# Altium PCB pcb.PcbDoc
Units mil, origin at the board's own origin, x right, y up, seen from the top; angles counter-clockwise.
Board outline 2565 x 2010 mil, 2 copper layers (Top Layer, Bottom Layer); 7 components, 13 nets, 52 pads, 0 vias.
Unrouted connection lines stored in the file: 10.
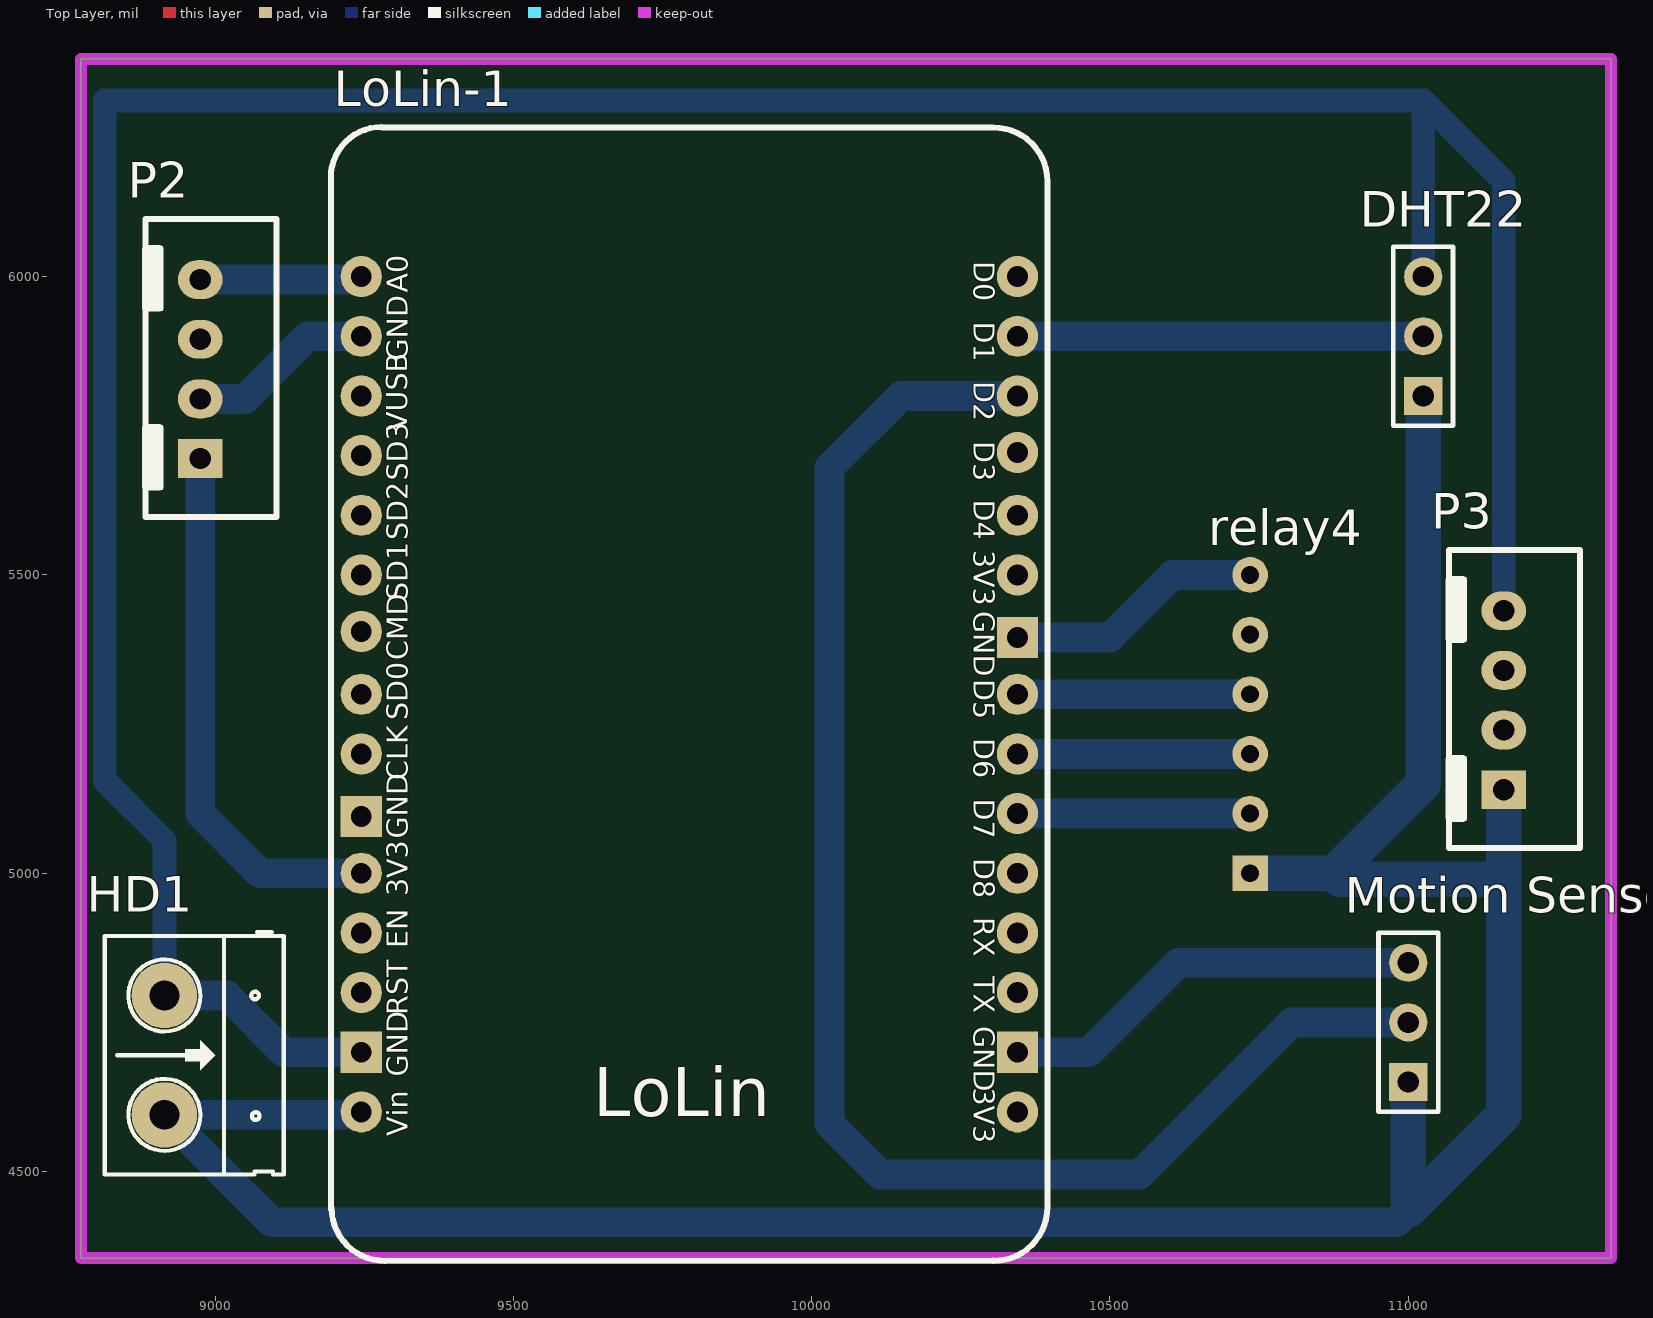
[diagram p0: Top Layer view]
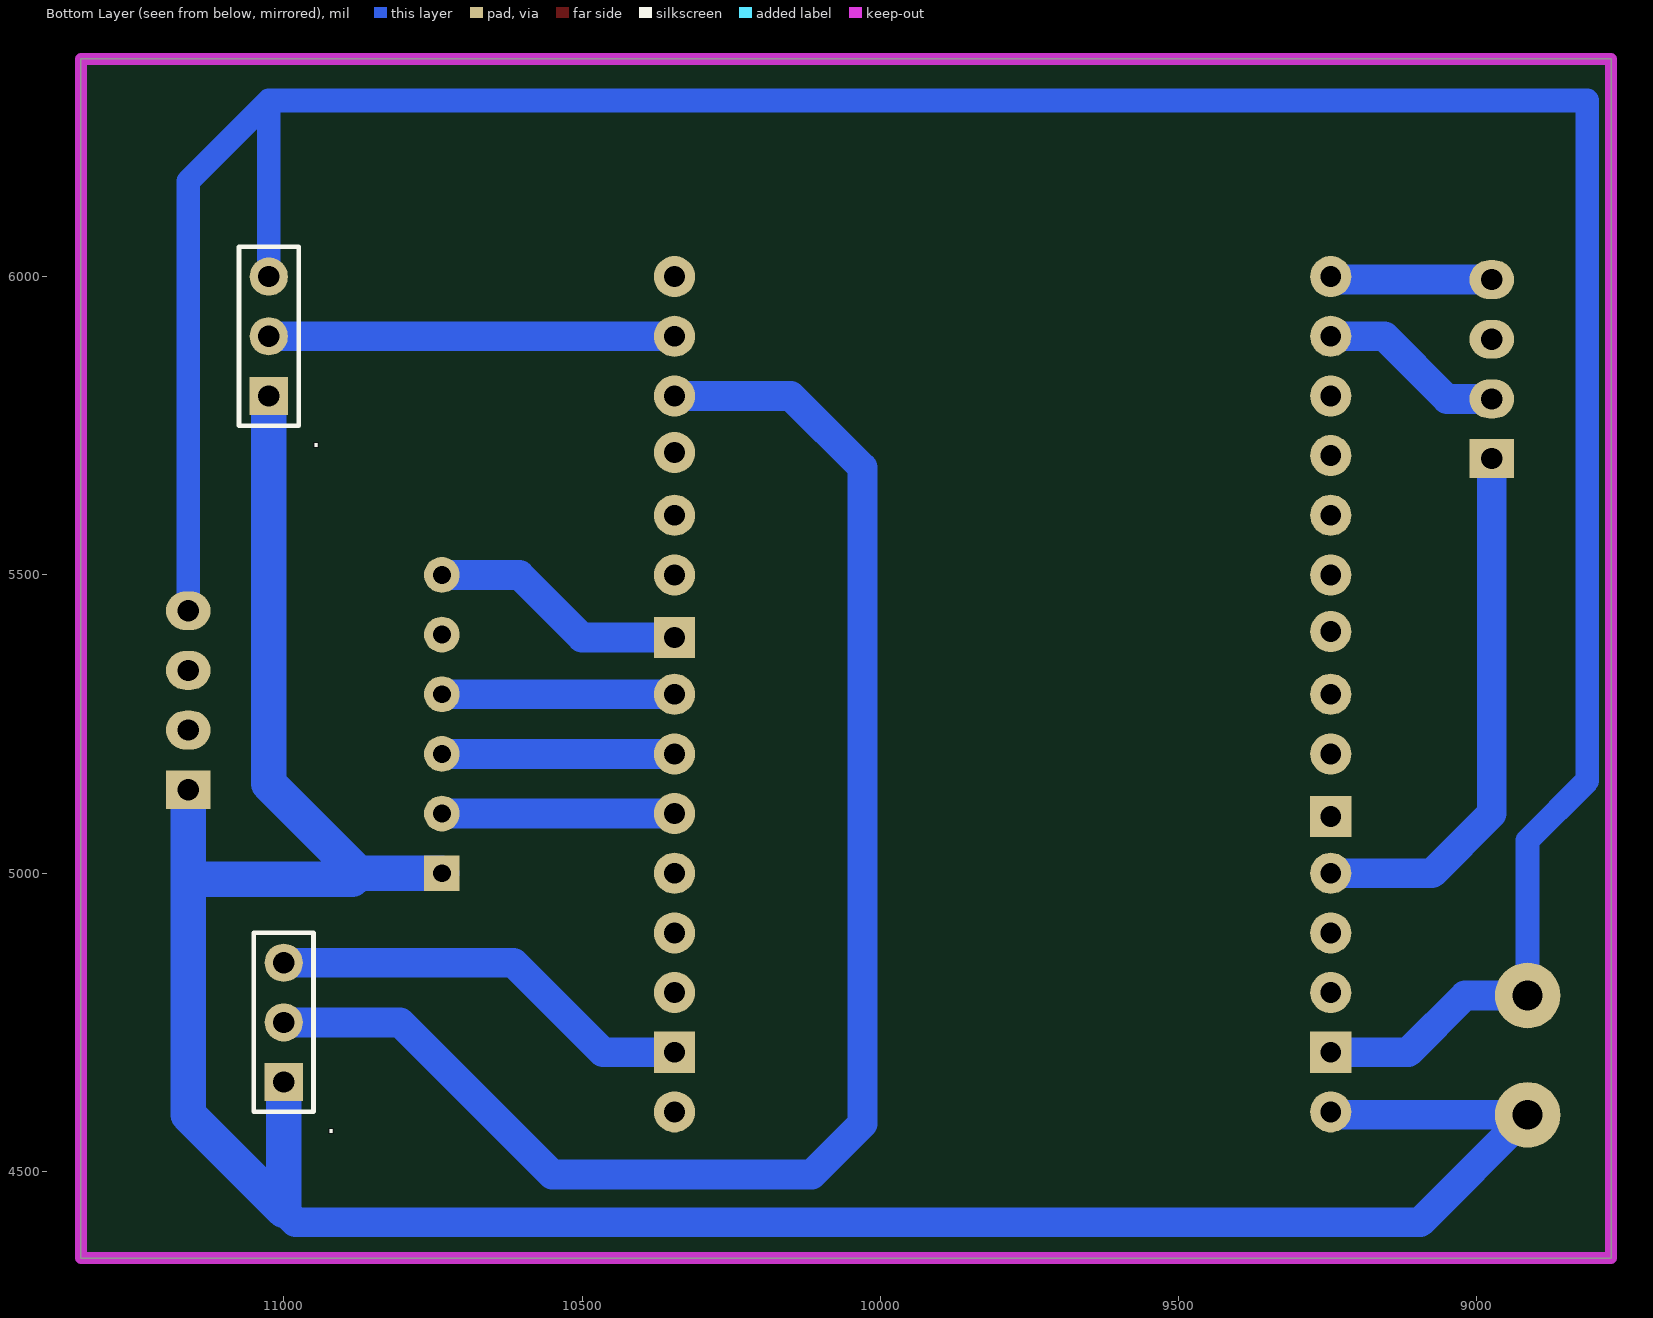
[diagram p1: Bottom Layer view, seen from below]

## Layer stack, top to bottom
Top Solder: solder mask 0.4, Solder Resist, Dk 3.5
Top Layer: signal copper 1.4
Dielectric 1: dielectric 12.6, FR-4, Dk 4.8
Bottom Layer: signal copper 1.4
Bottom Solder: solder mask 0.4, Solder Resist, Dk 3.5

## Board outline
8775,4355 8775,6365 11340,6365 11340,4355

## Design rules (kind name [scope] priority, off if disabled: settings)
Clearance [All] p1: gap=10
PolygonConnect [All] p1: connectstyle=Relief reliefconductorwidth=10 reliefentries=4 polygonreliefangle="90 Angle" airgapwidth=10
RoomDefinition schem [InComponentClass('schem')] p1: confinementstyle=ConfineIn formatcopy=TRUE lockcomponents=FALSE outline 0,0 2000,0 2000,1000 0,1000
RoutingVias [All] p1: holewidth=28 width=50 viastyle="Through Hole" minholewidth=28 minwidth=50 maxholewidth=28 maxwidth=50
SolderMaskExpansion [All] p1: expansion=4
Width [All] p1: maxlimit=100 minlimit=10 preferedwidth=10 toplayer_minwidth=0 minimp=50.000000 maximp=50.000000 favimp=50.000000
30 further rules are at their usual default settings.

## Components (designator, comment, footprint, x,y, rotation, side; value= is the part's Value field where it differs from the comment)
DHT22 "IO" CON.HDR1X3 11025,5800 r90 top
HD1 "Header 2" HED2 8915,4795 r270 top
LoLin-1 "NodeMCU V1.0 ESP-12E_1" "LoLin NodeMcu V3" 9294,6246 r0 top
"Motion Sensor" "IO" CON.HDR1X3 11000,4650 r90 top
P2 "Light Sensor" "CON Header 4" 8946,5894 r90 top
P3 "Distance Sensor" "CON Header 4" 11131,5339 r90 top
relay4 "relay4" PCBComponent_1 10725,5250 r270 top

## Footprints (in the part's own frame and the unit in brackets; to place one, negate y for a bottom-side part, rotate by r counter-clockwise, add the part's x,y. Pads: shape width x height; smd on the part's side, far side on the other; paste and mask are expansions set on the pad)
"CON Header 4" [mil]
  rect 65x75 hole 35.43: 1(-199,-29)
  oval 65x75 hole 35.43: 2(-99,-29) 3(1,-29) 4(101,-29)
  silkscreen extent -297,-157 203,68, body extent -300,-157 200,103, height 485
CON.HDR1X3 [mil]
  rect 64x64 hole 35.43: 1(0,0)
  round 64 hole 35.43: 2(100,0) 3(200,0)
  silkscreen extent -50,-50 250,50, body extent -50,-50 250,50, height 350
HED2 [mil] "Header 2, 2 pin, hight 300mil, Pin to Pin 200, Colour Green"
  round 110 hole 50: 1(0,0) 2(200,0)
  silkscreen extent -106,-100 300,200, body extent -92,-140 302,155, height 394
"LoLin NodeMcu V3" [mil]
  round 69 hole 35: 3V3(-49,-1246) 3V3(1051,-1646) 3V3(1051,-746) A0(-49,-246) CLK(-49,-1046) CMD(-49,-841) D0(1051,-246) D1(1051,-346) D2(1051,-446) D3(1051,-541) D4(1051,-646) D5(1051,-946) D6(1051,-1046) D7(1051,-1146) D8(1051,-1246) EN(-49,-1346) GND(-49,-346) RST(-49,-1446) RX(1051,-1346) SD0(-49,-946) SD1(-49,-746) SD2(-49,-646) SD3(-49,-546) TX(1051,-1446) VIN(-49,-1646) VUSB(-49,-446)
  rect 69x69 hole 35: GND(-49,-1546) GND(-49,-1151) GND(1051,-1546) GND(1051,-851)
  silkscreen extent -100,-1896 1101,5
PCBComponent_1 [mil]
  round 60 hole 30: GND(-250,10) IN1(-150,10) IN2(-50,10) IN3(50,10) IN4(150,10)
  rect 60x60 hole 30: VCC(250,10)

## Part data
DHT22 "Motion Sensor": library part CON.HDR1x3, "Header 1x3"
HD1: library part Hed2, "Header 2 (Green)"
LoLin-1: "LoLin NodeMCU V3"
P2 P3: library part "Header 4", "Header, 4-Pin"

## Nets (pads, with @x,y where several pads share a name; then routed paths per layer and width w, separated by ;. In a path a pad name is that pad's centre, name@x,y a point inside that pad or via, vN(x,y) a via of type N, cw(c..) or ccw(c..) an arc to the next point about the centre after c; other vN are vias at no path point)
3V3: LoLin-1.3V3 P2.1 | length 906.4
  Bottom Layer w50: P2.1 8975,5100 9075,5000 LoLin-1.3V3@9245,5000
DHT-5: DHT22.2 LoLin-1.D1 | length 680
  Bottom Layer w50: LoLin-1.D1 DHT22.2
ECHO15: LoLin-1.D8 P3.3
GND: "Motion Sensor.3" LoLin-1.GND P2.2 | length 1037.7
  Bottom Layer w30: 10995,4845 11000,4850
  Bottom Layer w50: P2.2 9050,5795 9155,5900 LoLin-1.GND@9245,5900 ; LoLin-1.GND@10345,4700 10465,4700 10615,4850 11000,4850
IN1: LoLin-1.D0 relay4.IN1
IN2: LoLin-1.D5 relay4.IN2 | length 390
  Bottom Layer w50: LoLin-1.D5 relay4.IN2
IN3: LoLin-1.D6 relay4.IN3 | length 390
  Bottom Layer w50: LoLin-1.D6 relay4.IN3
IN4: LoLin-1.D7 relay4.IN4 | length 390
  Bottom Layer w50: LoLin-1.D7 relay4.IN4
LIGHT: LoLin-1.A0 P2.4 | length 272.1
  Bottom Layer w30: LoLin-1.A0@9240,5995 LoLin-1.A0
  Bottom Layer w50: P2.4 LoLin-1.A0@9240,5995
MOTION-4: "Motion Sensor.2" LoLin-1.D2 | length 2575.5
  Bottom Layer w50: LoLin-1.D2 10150,5800 10030,5680 10030,4580 10115,4495 10550,4495 10805,4750 11000,4750
TRIG0: LoLin-1.D3 P3.2
VOUT+: "Motion Sensor.1" DHT22.1 HD1.2 LoLin-1.VIN P3.1 relay4.VCC | length 4770.4
  Bottom Layer w50: LoLin-1.VIN 9240,4595 HD1.2 9095,4415 10980,4415 10995,4430
  Bottom Layer w60: relay4.VCC 10875,5000 ; 11000,4650 11000,4435 11160,4595 11160,4990 ; DHT22.1 11025,5150 10875,5000 ; P3.1 11160,4990 ; 10875,5000 10885,4990 11160,4990
VOUT-: DHT22.3 HD1.1 P3.4 relay4.GND | length 5774.3
  Bottom Layer w40: HD1.1 8915,5055 8815,5155 8815,6295 11025,6295 ; 9245,4700 9255,4710 ; DHT22.3 11025,6295 ; P3.4 11160,6160 11025,6295
  Bottom Layer w50: HD1.1 9020,4795 9115,4700 9245,4700 ; 10345,5395 10500,5395 10605,5500 relay4.GND
pads on no net: LoLin-1.CLK LoLin-1.CMD LoLin-1.D4 LoLin-1.EN LoLin-1.RST LoLin-1.RX LoLin-1.SD0 LoLin-1.SD1 LoLin-1.SD2 LoLin-1.SD3 LoLin-1.TX LoLin-1.VUSB P2.3

## Keep-outs
Keep-Out Layer:
  lines w20: 8775,4355 8775,6235 8775,6365 11340,6365 11340,4355 8775,4355

## Text inside footprints (layer, text, board x,y; h text height)
LoLin-1: Top Overlay "LoLin" at 9634,4566 h140; Top Overlay "CLK" at 9335,5156 h60 r90; Top Overlay "SD0" at 9335,5256.43 h60 r90; Top Overlay "SD1" at 9335,5457.29 h60 r90; Top Overlay "SD2" at 9335,5557.71 h60 r90; Top Overlay "SD3" at 9335,5658.14 h60 r90; Top Overlay "VUSB" at 9334,5741 h60 r90; Top Overlay "GND" at 9335,5859 h60 r90; Top Overlay "A0" at 9335,5973 h60 r90; Top Overlay "D5" at 10260,5325 h60 r270; Top Overlay "GND" at 10260,5439 h60 r270; Top Overlay "3V3" at 10260,5540.99 h60 r270; Top Overlay "D4" at 10260,5626 h60 r270; Top Overlay "D3" at 10260,5724.42 h60 r270; Top Overlay "D2" at 10260,5824.42 h60 r270; Top Overlay "D1" at 10260,5924.65 h60 r270; Top Overlay "D0" at 10260,6026 h60 r270; Top Overlay "CMD" at 9335,5356.86 h60 r90; Top Overlay "D6" at 10260,5225.88 h60 r270; Top Overlay "3V3" at 10260,4640 h60 r270; Top Overlay "GND" at 10260,4743.8 h60 r270; Top Overlay "TX" at 10260,4827 h60 r270; Top Overlay "RX" at 10260,4925.94 h60 r270; Top Overlay "D8" at 10260,5024.89 h60 r270; Top Overlay "D7" at 10260,5124.77 h60 r270; Top Overlay "Vin" at 9335,4559 h60 r90; Top Overlay "GND" at 9335,4659 h60 r90; Top Overlay "RST" at 9335,4762 h60 r90; Top Overlay "EN" at 9335,4874 h60 r90; Top Overlay "3V3" at 9335,4961 h60 r90; Top Overlay "GND" at 9335,5058 h60 r90